# EAGLE board powerBoard (EAGLE 9.3.0)
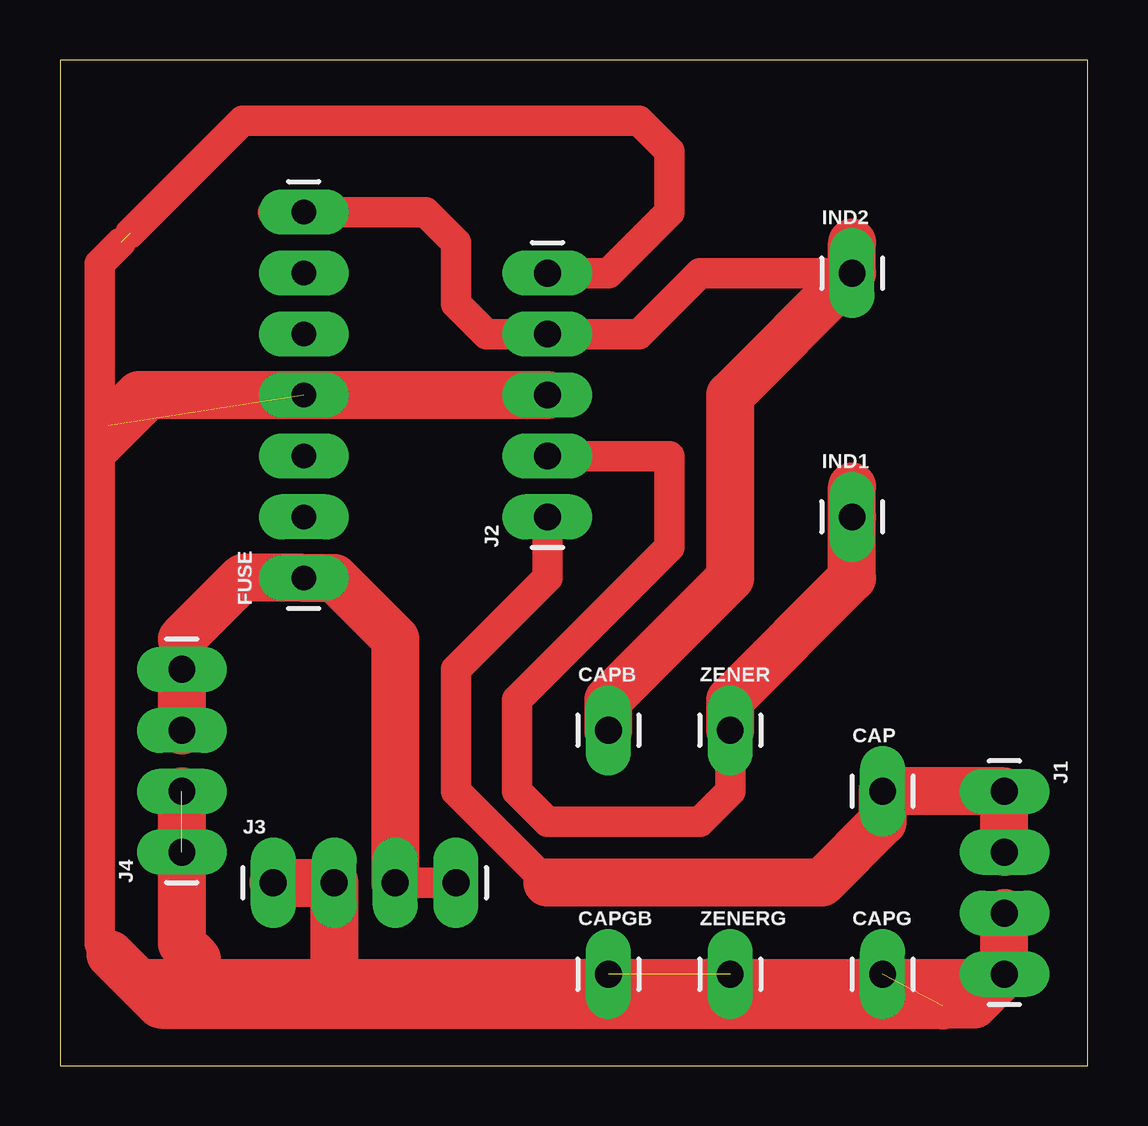
[diagram p0: board, top side]

Size 42.85 x 41.9 mm. Coordinates in mm from the lower left corner, seen from the top.
Outline: 0,0 42.85,0 42.85,41.9 0,41.9 0,0
Copper layers (1*16): Top 0.035mm / dielectric 1.5mm / Bottom 0.035mm
Design rules "default": minimum track width 6mil, minimum drill 0.35mm, track to track 6mil, track to pad 6mil, pad to pad 6mil, via to via 6mil, smd to smd 6mil, copper to edge 40mil, drill to drill 6mil, minimum pad ring 10mil, minimum via ring 8mil, stop-mask expansion 4mil, vias tented up to drill 0mil, thermal gap 10mil

## Footprints (pad centres in the part's own frame; a part is rotated, then mirrored left to right if it is on the bottom)
1X01_LONGPAD = drill 1.118 pad 1.88 long: 1 0,0
1X07_LONGPADS = drill 1.016 pad 1.88 long: 1 0,0; 2 2.54,0; 3 5.08,0; 4 7.62,0; 5 10.16,0; 6 12.7,0; 7 15.24,0
1X04_LONGPADS = drill 1.118 pad 1.88 long: 1 0,0; 2 2.54,0; 3 5.08,0; 4 7.62,0
1X05_LONGPADS = drill 1.118 pad 1.88 long: 1 0,0; 2 2.54,0; 3 5.08,0; 4 7.62,0; 5 10.16,0

## Placement (x,y rotation side)
CAP  [1X01_LONGPAD]  34.29,11.43 0 top
CAPB  [1X01_LONGPAD]  22.86,13.97 0 top
CAPG  [1X01_LONGPAD]  34.29,3.81 0 top
CAPGB  [1X01_LONGPAD]  22.86,3.81 0 top
FUSE  [1X07_LONGPADS]  10.16,20.32 90 top
IND1  [1X01_LONGPAD]  33.02,22.86 0 top
IND2  [1X01_LONGPAD]  33.02,33.02 0 top
J1  [1X04_LONGPADS]  39.37,11.43 270 top
J2  [1X05_LONGPADS]  20.32,22.86 90 top
J3  [1X04_LONGPADS]  8.89,7.62 0 top
J4  [1X04_LONGPADS]  5.08,8.89 90 top
ZENER  [1X01_LONGPAD]  27.94,13.97 0 top
ZENERG  [1X01_LONGPAD]  27.94,3.81 0 top

## Library data of the parts
CAP CAPB CAPG CAPGB FUSE IND1 IND2 J2 ZENER ZENERG = SparkFun-Connectors
J1 J3 J4 = SparkFun-Connectors; PROD_ID: CONN-09696

## Nets
GND: CAPG.1 CAPGB.1 FUSE.4 J2.3 J2.5 J3.1 J3.2 J4.1 J4.2 ZENERG.1
INPUT: CAP.1 J1.1 J1.2 J2.1
N$1: CAPB.1 FUSE.7 IND2.1 J2.4
N$2: IND1.1 J2.2 ZENER.1
N$3: J1.3 J1.4
OUTPUT: FUSE.1 J3.3 J3.4 J4.3 J4.4

## Tracks (layer width: path | path; a pad name or v marks a point on that pad's centre or on a via)
GND  (5 unrouted)
  Top 1.27: J2.5 22.86,33.02 25.4,35.56 25.4,38.1 24.13,39.37 7.62,39.37 2.92,34.67 | 6.35,3.81 2.92,3.81 2.1,4.63 1.65,5.08 1.65,25.4 | 6.35,3.81 11.43,3.81 CAPGB.1 39.24,3.81 | 2.54,34.29 1.65,33.4 1.65,25.4 | 5.71,4.45 6.35,3.81 | 1.65,25.4 4.19,27.94
  Top 2: 2.1,4.63 4.19,2.54 36.74,2.54 36.79,2.5 | 5.71,4.45 5.08,5.08 J4.2 | J3.1 J3.2 11.43,3.81 | J2.3 4.19,27.94 3.29,27.94 2.02,26.67
INPUT
  Top 1.27: 20.32,7.62 16.51,11.43 16.51,16.51 20.32,20.32 J2.1
  Top 2: J1.2 J1.1 CAP.1 34.29,10.16 31.75,7.62 20.32,7.62
N$1
  Top 1.27: 8.89,35.56 FUSE.7 15.24,35.56 16.51,34.29 16.51,31.75 17.78,30.48 J2.4 24.13,30.48 26.67,33.02 IND2.1
  Top 2: CAPB.1 22.86,15.24 27.94,20.32 27.94,27.94 IND2.1 33.02,34.29
N$2
  Top 1.27: ZENER.1 27.94,11.43 26.67,10.16 20.32,10.16 19.05,11.43 19.05,15.24 25.4,21.59 25.4,25.4 J2.2
  Top 2: ZENER.1 27.94,15.24 33.02,20.32 IND1.1 33.02,24.13
N$3
  Top 2: J1.3 39.37,5.6 J1.4 38.1,2.54 36.83,2.54
OUTPUT
  Top 1.27: 5.08,17.78 J4.4 | J3.3 J3.4
  Top 2: J3.3 13.97,17.78 11.43,20.32 FUSE.1 7.62,20.32 5.08,17.78 | J4.4 J4.3